# Altium PCB pcb-lcd-cnc.PcbDoc
Units mm, origin at the board's own origin, x right, y up, seen from the top; angles counter-clockwise.
Board outline 96.9 x 63.14 mm, 2 copper layers (Top Layer, Bottom Layer); 18 components, 24 nets, 98 pads, 30 vias.
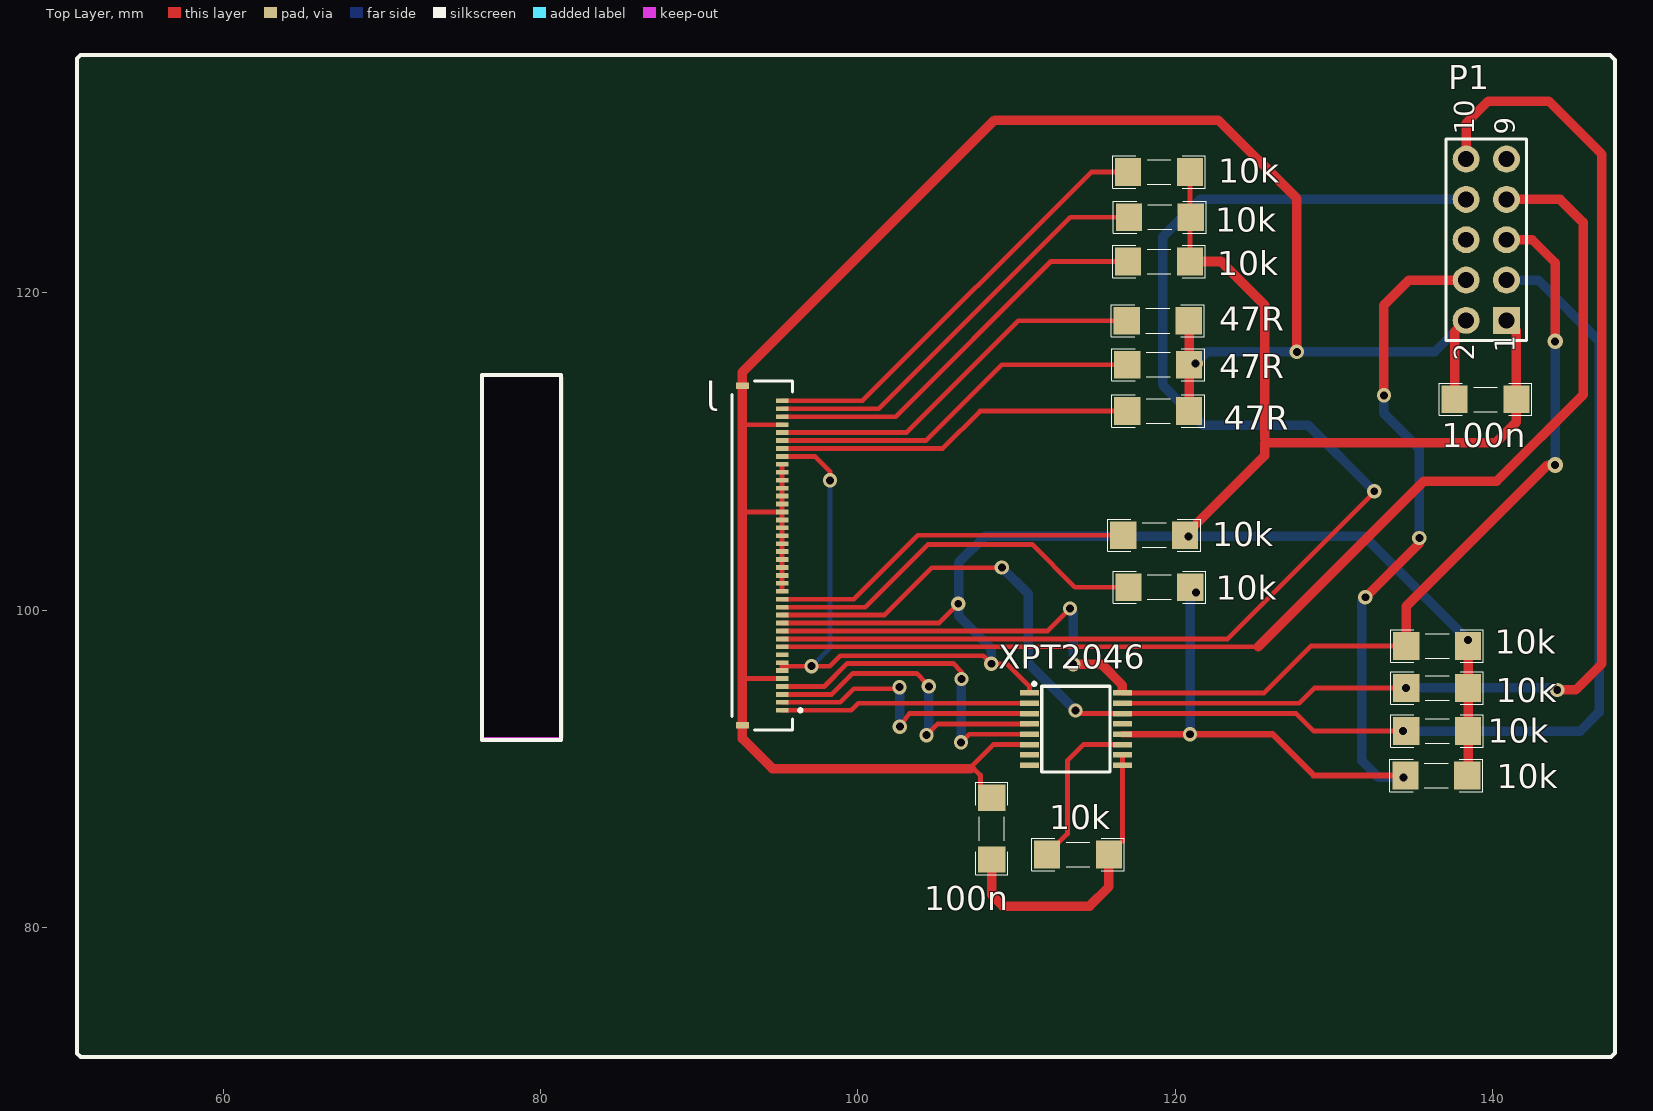
[diagram p0: Top Layer view]
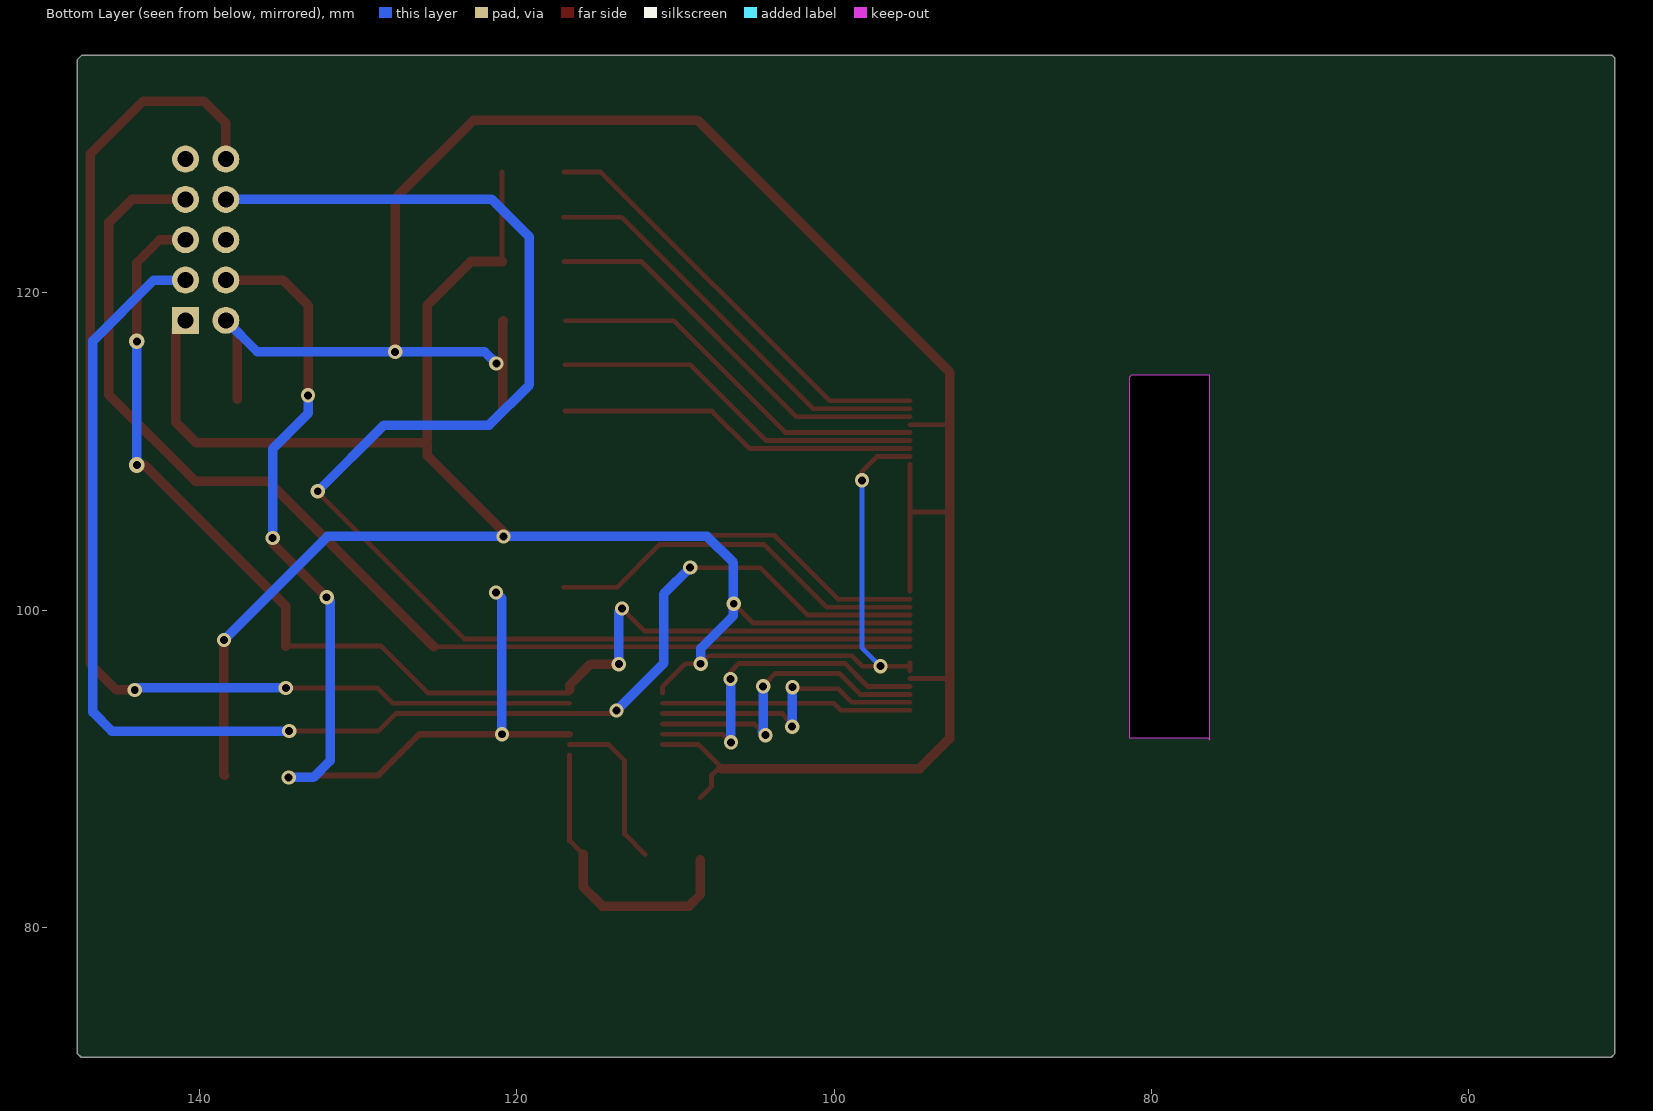
[diagram p1: Bottom Layer view, seen from below]
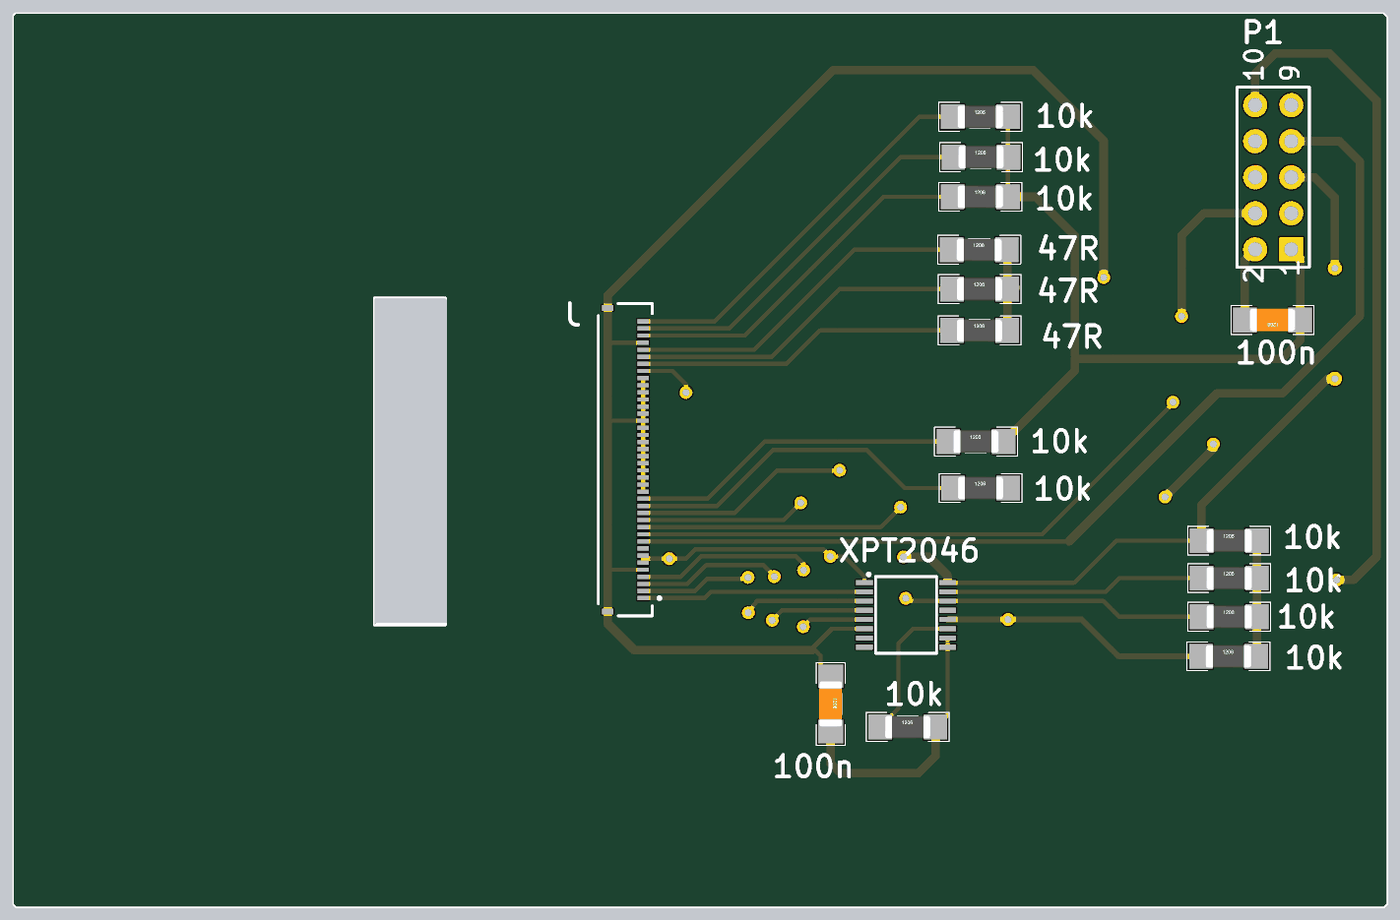
[diagram p2: 3D render of the assembled board from above, using the file's embedded part models]

## Layer stack, top to bottom
Top Solder: solder mask 0.0102, Solder Resist, Dk 3.5
Top Layer: signal copper 0.0356
Dielectric 1: dielectric 0.32, FR-4, Dk 4.8
Bottom Layer: signal copper 0.0356
Bottom Solder: solder mask 0.0102, Solder Resist, Dk 3.5

## Board outline
51.029,71.831 50.8,72.06 50.8,134.772 51.003,134.976 147.396,134.976 147.701,134.671 147.701,72.085 147.447,71.831
cut-out: 76.327,114.808 81.28,114.808 81.407,114.681 81.407,91.948 76.454,91.948 76.327,91.821

## Design rules (kind name [scope] priority, off if disabled: settings)
Clearance [All] p1: gap=0.1 ignorepadtopadclearanceinfootprint=FALSE
PolygonConnect [All] p1: connectstyle=Relief reliefconductorwidth=0.254 reliefentries=4 polygonreliefangle="90 Angle" airgapwidth=0.254
RoutingVias [All] p1: holewidth=0.711 width=1.27 viastyle="Through Hole" minholewidth=0.711 minwidth=1.27 maxholewidth=0.711 maxwidth=1.27
SolderMaskExpansion [All] p1: expansion=0.102
Width [All] p1: maxlimit=0.6 minlimit=0.2 preferedwidth=0.3
30 further rules are at their usual default settings.

## Classes and differential pairs
component class lcd_pin: 10k 47r 47R 100n IC1 J M? P1 xpt2046

## Components (designator, comment, footprint, x,y, rotation, side; value= is the part's Value field where it differs from the comment)
10k "1K" RESC4817X04N 118.974,127.61 r0 top (schematic designator R13)
10k "1K" RESC4817X04N 119.024,124.765 r0 top (schematic designator R12)
10k "1K" RESC4817X04N 118.974,121.971 r0 top (schematic designator R11)
10k "1K" RESC4817X04N 113.868,84.607 r0 top (schematic designator R7)
10k "1K" RESC4817X04N 136.449,89.586 r0 top (schematic designator R6)
10k "1K" RESC4817X04N 136.5,92.38 r0 top (schematic designator R5)
10k "1K" RESC4817X04N 136.5,95.098 r0 top (schematic designator R4)
10k "1K" RESC4817X04N 136.5,97.739 r0 top (schematic designator R3)
10k "1K" RESC4817X04N 118.669,104.724 r0 top (schematic designator R2)
10k "1K" RESC4817X04N 118.999,101.448 r0 top (schematic designator R1)
47R "1K" RESC4817X04N 118.897,118.237 r0 top (schematic designator R10)
47R "1K" RESC4817X04N 118.923,115.468 r0 top (schematic designator R9)
47R "1K" RESC4817X04N 118.923,112.547 r0 top (schematic designator R8)
100n "0.1uF" CAPC4817X12N 108.433,86.233 r270 top (schematic designator C2)
100n "0.1uF" CAPC4817X12N 139.548,113.284 r180 top (schematic designator C1)
J "FFC2B28-40-G" GCT_FFC2B28-40-G 93.975,103.44 r90 top
P1 "Header 5X2" HDR2X5 140.868,118.262 r90 top
XPT2046 "XPT2046" TSSOP16 113.741,92.507 r0 top (schematic designator IC1)

## Footprints (in the part's own frame and the unit in brackets; to place one, negate y for a bottom-side part, rotate by r counter-clockwise, add the part's x,y. Pads: shape width x height; smd on the part's side, far side on the other; paste and mask are expansions set on the pad)
CAPC4817X12N [mm] "Chip Capacitor, 2-Leads, Body 4/80x1/70mm, IPC Medium Density-Design:Abbas Basereh"
  rect 1.65x1.75 smd: 1(-1.95,0) 2(1.95,0)
  silkscreen extent -2.92,-1.02 2.92,1.02, body extent -1.6,-0.8 1.6,0.8, height 1
GCT_FFC2B28-40-G [mm]
  rect 0.3x0.8 smd: 1(-9.75,-1.25) 2(-9.25,-1.25) 3(-8.75,-1.25) 4(-8.25,-1.25) 5(-7.75,-1.25) 6(-7.25,-1.25) 7(-6.75,-1.25) 8(-6.25,-1.25) 9(-5.75,-1.25) 10(-5.25,-1.25) 11(-4.75,-1.25) 12(-4.25,-1.25) 13(-3.75,-1.25) 14(-3.25,-1.25) 15(-2.75,-1.25) 16(-2.25,-1.25) 17(-1.75,-1.25) 18(-1.25,-1.25) 19(-0.75,-1.25) 20(-0.25,-1.25) 21(0.25,-1.25) 22(0.75,-1.25) 23(1.25,-1.25) 24(1.75,-1.25) 25(2.25,-1.25) 26(2.75,-1.25) 27(3.25,-1.25) 28(3.75,-1.25) 29(4.25,-1.25) 30(4.75,-1.25) 31(5.25,-1.25) 32(5.75,-1.25) 33(6.25,-1.25) 34(6.75,-1.25) 35(7.25,-1.25) 36(7.75,-1.25) 37(8.25,-1.25) 38(8.75,-1.25) 39(9.25,-1.25) 40(9.75,-1.25)
  rect 0.4x0.8 smd: S1(-10.7,1.25) S2(10.7,1.25)
  silkscreen extent -11,-2.5 11,1.9
HDR2X5 [mm] "Connector; Header; 5x2 Position"
  rect 1.7x1.7 hole 1: 1(0,0)
  round 1.7 hole 1: 2(0,2.54) 3(2.54,0) 4(2.54,2.54) 5(5.08,0) 6(5.08,2.54) 7(7.62,0) 8(7.62,2.54) 9(10.16,0) 10(10.16,2.54)
  silkscreen extent -1.27,-1.27 11.43,3.81
RESC4817X04N [mm] "Chip Resistor, 2-Leads, Body 4/80x1/70mm, IPC Medium Density-Design:Abbas Basereh"
  rect 1.65x1.75 smd: 1(-1.95,0) 2(1.95,0)
  silkscreen extent -2.92,-1.02 2.92,1.02, body extent -1.6,-0.8 1.6,0.8, height 1
TSSOP16 [mm]
  rect 1.2x0.35 smd: 1(-2.925,2.275) 2(-2.925,1.625) 3(-2.925,0.975) 4(-2.925,0.325) 5(-2.925,-0.325) 6(-2.925,-0.975) 7(-2.925,-1.625) 8(-2.925,-2.275) 9(2.925,-2.275) 10(2.925,-1.625) 11(2.925,-0.975) 12(2.925,-0.325) 13(2.925,0.325) 14(2.925,0.975) 15(2.925,1.625) 16(2.925,2.275)
  silkscreen extent -2.72,-2.7 2.15,2.95

## Part data
10k 10k 10k 10k 10k 10k 10k 10k 10k 10k 47R 47R 47R: library part "RES 1206 0.25W", "RES 1206", Data=16-12-2016, Desc.="RES SMD 1206", Designer="Abbas Basereh"
100n 100n: library part "CAP SMD 1206", "CAP 1206", Data=16-12-2016, Desc.="CAP SMD 1206", Designer="Abbas Basereh"
J: "40 Position FFC, FPC Connector Contacts, Top and Bottom 0.020 _0.50mm_ Surface Mount, Right Angle", Package="Package Analog Devices", Availability=Unavailable, MF="Global Connector Technology", MP=FFC2B28-40-G, Price=None, SnapEDA_Link=https://www.snapeda.com/parts/FFC2B28-40-G/Global%20Connector%20Technology/view-part/4223068/?ref=snap
P1: "Header, 5-Pin, Dual row", LatestRevisionDate=17-Jul-2002, LatestRevisionNote="Re-released for DXP Platform.", Publisher="Altium Limited"
XPT2046: "RASPBERRY PI 3.5 TFT DISPLAY", Package=Package, Availability="Not in stock", Check_prices=https://www.snapeda.com/parts/XPT2046/Xptek/view-part/?ref=eda, MF=Xptek, MP=XPT2046, Price=None, SnapEDA_Link=https://www.snapeda.com/parts/XPT2046/Xptek/view-part/?ref=snap

## Via types
v1: diameter 0.9, hole 0.5, Top Layer to Bottom Layer, 28 vias
v2: diameter 1, hole 0.5, Top Layer to Bottom Layer, 2 vias

## Nets (pads, with @x,y where several pads share a name; then routed paths per layer and width w, separated by ;. In a path a pad name is that pad's centre, name@x,y a point inside that pad or via, vN(x,y) a via of type N, cw(c..) or ccw(c..) an arc to the next point about the centre after c; other vN are vias at no path point)
cs_lcd: J.9 P1.7 | length 73.3
  Top Layer w0.3: J.9 125.223,97.69
  Top Layer w0.6: 125.223,97.69 135.661,108.128 140.259,108.128 145.694,113.563 145.694,124.435 144.247,125.882 P1.7
cs_touch: 10k.1@134.55,95.098 P1.10 XPT2046.15 | length 76.2
  Top Layer w0.3: XPT2046.15 127.812,94.132 128.778,95.098 v1(134.55,95.098)
  Top Layer w0.6: P1.10 138.328,130.683 139.725,132.08 143.535,132.08 146.888,128.727 146.888,96.622 145.237,94.971 v1(144.069,94.971)
  Bottom Layer w0.6: v1(134.55,95.098) v1@144.069,95.098
GND: 47R.2 100n.1@108.433,88.183 100n.2@137.598,113.284 J.5 J.16 J.17 J.18 J.19 J.20 J.21 J.22 J.23 J.24 J.25 J.26 J.27 J.28 J.29 J.30 J.31 J.32 J.37 J.S1 J.S2 P1.2 XPT2046.6 | length 143.2
  Top Layer w0.2: 92.725,111.582 92.832,111.69
  Top Layer w0.3: 92.725,95.733 92.767,95.69 J.5 ; 92.725,106.147 92.768,106.19 J.26 ; 92.832,111.69 J.37 ; J.16 J.17 J.18 J.19 J.20 J.21 J.22 J.23 J.24 J.25 J.26 ; J.32 J.31 J.30 J.29 J.28 J.27 J.26 ; 100n.1@108.433,88.183 107.721,88.894 107.721,89.611 107.315,90.018 107.01,90.018 108.524,91.532 XPT2046.6
  Top Layer w0.6: 107.112,90.018 94.615,90.018 92.725,91.908 J.S1 92.725,95.733 92.725,106.147 92.725,111.582 J.S2 92.725,115 108.61,130.886 122.707,130.886 127.66,125.933 v1(127.66,116.281) ; 47R.2@120.847,118.237 120.873,118.212 47R.2@120.873,115.545 ; 47R.2@120.873,112.547 47R.2@120.873,115.468 ; 100n.2@137.598,113.284 137.598,117.532 P1.2
  Bottom Layer w0.6: v1(121.285,115.545) 122.022,116.281 v1(127.66,116.281) 136.347,116.281 P1.2
miso: 10k.1@134.499,89.586 10k.2@120.949,101.448 P1.4 XPT2046.12 | length 68.2
  Top Layer w0.3: v1(134.372,89.459) 10k.1@134.499,89.586
  Top Layer w0.4: XPT2046.12 v1(120.929,92.182) 126.131,92.182 128.727,89.586 10k.1@134.499,89.586
  Top Layer w0.6: v1(131.978,100.813) 135.382,104.216 v1(135.382,104.546) ; v1(133.147,113.538) 133.147,119.228 134.722,120.802 P1.4
  Bottom Layer w0.6: v1(120.929,92.182) 120.929,100.736 v1(121.31,101.117) ; v1(131.978,100.813) 131.75,100.584 131.75,90.526 132.817,89.459 v1(134.372,89.459) ; v1(133.147,113.538) 133.147,112.395 135.382,110.16 v1(135.382,104.546)
mosi: 10k.1@134.55,92.38 J.13 P1.3 XPT2046.14 | length 91
  Top Layer w0.3: J.13 101.671,99.69 104.648,102.667 v1@109.017,102.667 ; v1(113.716,93.675) 113.909,93.482 XPT2046.14 127.625,93.482 128.727,92.38 v1(134.341,92.38) 10k.1@134.55,92.38
  Bottom Layer w0.6: v1(109.068,102.692) 110.744,101.016 110.744,96.647 v1(113.716,93.675) ; v1(134.341,92.38) 145.517,92.38 146.71,93.574 146.71,116.967 142.875,120.802 P1.3
NetC2_2: 10k.2@115.818,84.607 100n.2@108.433,84.283 XPT2046.9 XPT2046.10 | length 19.1
  Top Layer w0.3: 10k.2@115.818,84.607 116.666,85.455 XPT2046.9 XPT2046.10
  Top Layer w0.6: 100n.2@108.433,84.283 108.433,82.067 109.144,81.356 114.605,81.356 115.818,82.57 10k.2@115.818,84.607
NetIC1_11: 10k.1@111.918,84.607 XPT2046.11 | length 10.3
  Top Layer w0.3: 10k.1@111.918,84.607 113.208,85.897 113.208,90.526 114.214,91.532 XPT2046.11
NetJ_14: 10k.1@117.049,101.448 J.14 | length 24.6
  Top Layer w0.3: J.14 100.469,100.19 104.419,104.14 110.973,104.14 113.665,101.448 10k.1@117.049,101.448
NetJ_15: 10k.1@116.719,104.724 J.15 | length 23.2
  Top Layer w0.3: J.15 99.75,100.69 103.784,104.724 10k.1@116.719,104.724
NetJ_34: 47R.1@116.973,112.547 J.34 | length 22.7
  Top Layer w0.3: J.34 105.338,110.19 107.696,112.547 47R.1@116.973,112.547
NetJ_35: 47R.1@116.973,115.468 J.35 | length 23.7
  Top Layer w0.3: J.35 104.289,110.69 109.068,115.468 47R.1@116.973,115.468
NetJ_36: 47R.1@116.947,118.237 J.36 | length 24.6
  Top Layer w0.3: J.36 103.062,111.19 110.109,118.237 47R.1@116.947,118.237
NetJ_38: 10k.1@117.024,121.971 J.38 | length 25.9
  Top Layer w0.3: J.38 102.385,112.19 112.166,121.971 10k.1@117.024,121.971
NetJ_39: 10k.1@117.074,124.765 J.39 | length 26.9
  Top Layer w0.3: J.39 101.311,112.69 113.386,124.765 10k.1@117.074,124.765
NetJ_40: 10k.1@117.024,127.61 J.40 | length 27.8
  Top Layer w0.3: J.40 100.287,113.19 114.706,127.61 10k.1@117.024,127.61
NetLabel103: P1.6
NetLabel108: P1.9
rs: J.10 P1.8 | length 86.9
  Top Layer w0.2: v1(132.537,107.493) v1@132.613,107.493
  Top Layer w0.3: J.10 123.31,98.19 v1@132.613,107.493
  Bottom Layer w0.6: v1(132.537,107.493) 128.372,111.658 121.742,111.658 119.202,114.198 119.202,123.52 121.564,125.882 P1.8
sck: 10k.1@134.55,97.739 J.11 P1.5 XPT2046.16 | length 77.6
  Top Layer w0.2: XPT2046.16 116.666,94.971
  Top Layer w0.3: J.11 111.949,98.69 v1(113.36,100.101) ; XPT2046.16 125.592,94.782 128.549,97.739 10k.1@134.55,97.739
  Top Layer w0.6: v1(113.563,96.596) 115.341,96.596 116.666,95.271 116.666,94.971 ; 10k.1@134.55,97.739 134.55,100.234 143.459,109.144 v2(143.942,109.144) ; P1.5 142.494,123.342 143.942,121.895 v2(143.942,116.942)
  Bottom Layer w0.6: v1(113.36,100.101) 113.563,99.898 v1(113.563,96.596) ; v2(143.942,109.144) v2(143.942,116.942)
VCC: 10k.2@120.619,104.724 10k.2@120.924,121.971 10k.2@120.924,127.61 10k.2@120.974,124.765 10k.2@138.45,92.38 10k.2@138.45,95.098 10k.2@138.45,97.739 10k.2@138.399,89.586 100n.1@141.498,113.284 J.6 J.7 J.12 J.33 P1.1 XPT2046.1 | length 147.5
  Top Layer w0.3: J.6 95.225,96.469 ; J.7 95.225,96.469 ; J.12 105.108,99.19 v1(106.324,100.406) ; J.33 97.295,109.69 98.247,108.737 v1(98.247,108.179) ; XPT2046.1 110.816,95.178 109.372,96.622 v1(108.407,96.622) 107.899,97.13 98.882,97.13 98.222,96.469 v1(97.079,96.469) 95.225,96.469 ; 10k.2@120.924,121.971 10k.2@120.924,127.61
  Top Layer w0.6: 10k.2@120.619,104.724 125.628,109.734 125.628,110.541 140.183,110.541 141.498,111.856 141.498,113.284 141.498,117.633 P1.1 ; 10k.2@120.924,121.971 122.885,121.971 125.628,119.228 125.628,110.846 ; 10k.2@138.399,89.586 138.45,89.637 138.45,92.38 138.45,95.098 138.45,97.739 v1(138.45,98.126)
  Bottom Layer w0.3: v1(97.079,96.469) 98.247,97.638 v1(98.247,108.179)
  Bottom Layer w0.6: v1(106.324,100.406) 106.35,100.381 106.35,99.644 108.407,97.587 v1(108.407,96.622) ; v1@106.35,100.406 106.35,102.997 108.001,104.648 v1(120.828,104.648) 131.928,104.648 v1(138.45,98.126)
x+: J.1 XPT2046.2 | length 15.8
  Top Layer w0.3: J.1 99.583,93.69 100.025,94.132 XPT2046.2
x-: J.3 XPT2046.4 | length 19.9
  Top Layer w0.3: J.3 98.347,94.69 99.67,96.012 103.708,96.012 v1@104.318,95.402 ; v1(104.318,92.126) 105.024,92.832 XPT2046.4
  Bottom Layer w0.6: v1(104.318,92.126) 104.521,92.329 104.47,92.38 v1(104.47,95.199)
y+: J.2 XPT2046.3 | length 18.9
  Top Layer w0.3: J.2 98.889,94.19 99.746,95.047 102.387,95.047 102.286,95.148 v1(102.616,95.148) ; v1(102.641,92.659) 103.235,93.482 XPT2046.3
  Bottom Layer w0.6: v1(102.641,92.659) v1@102.641,95.021
y-: J.4 XPT2046.5 | length 21.4
  Top Layer w0.3: J.4 97.882,95.19 99.339,96.647 105.994,96.647 106.528,96.114 v1(106.528,95.656) ; v1(106.502,91.669) 107.015,92.182 XPT2046.5
  Bottom Layer w0.6: v1(106.502,91.669) 106.502,95.783 106.528,95.758 v1(106.528,95.656)
pads on no net: J.8 XPT2046.7 XPT2046.8 XPT2046.13

## Silkscreen, mask and mechanical layers (free items; w line width, h text height)
Top Overlay:
  lines w0.254: 50.8,72.06 50.8,134.772 51.003,134.976 147.396,134.976 147.701,134.671 147.701,72.085 147.447,71.831 51.029,71.831 50.8,72.06 ; 76.327,91.821 76.327,114.808 81.28,114.808 81.28,91.821 76.327,91.821
Mechanical 2:
  lines w0.013: 51.749,72.358 51.749,134.358 146.749,134.358 146.749,72.358 51.749,72.358 ; 76.365,91.834 76.365,114.834 81.365,114.834 81.365,91.834 76.365,91.834 ; 91.634,92.058 91.634,115.058 96.634,115.058 96.634,92.058 91.634,92.058

## Text inside footprints (layer, text, board x,y; h text height)
P1: Top Overlay "10" at 138.836,129.946 h1.27 r90; Top Overlay "9" at 141.376,129.946 h1.27 r90; Top Overlay "1" at 141.376,116.23 h1.27 r90; Top Overlay "2" at 138.836,115.722 h1.27 r90